# Altium PCB Airbrake Motor Controller.PcbDoc (part 1 of 2)
Units mil, origin at the board's own origin, x right, y up, seen from the top; angles counter-clockwise.
Board outline 2250 x 2250 mil, 4 copper layers (Top Layer, Layer 1, Layer 2, Bottom Layer), stack 23.756 mil thick; 103 components, 85 nets, 338 pads, 160 vias.
Unrouted connection lines stored in the file: 19.
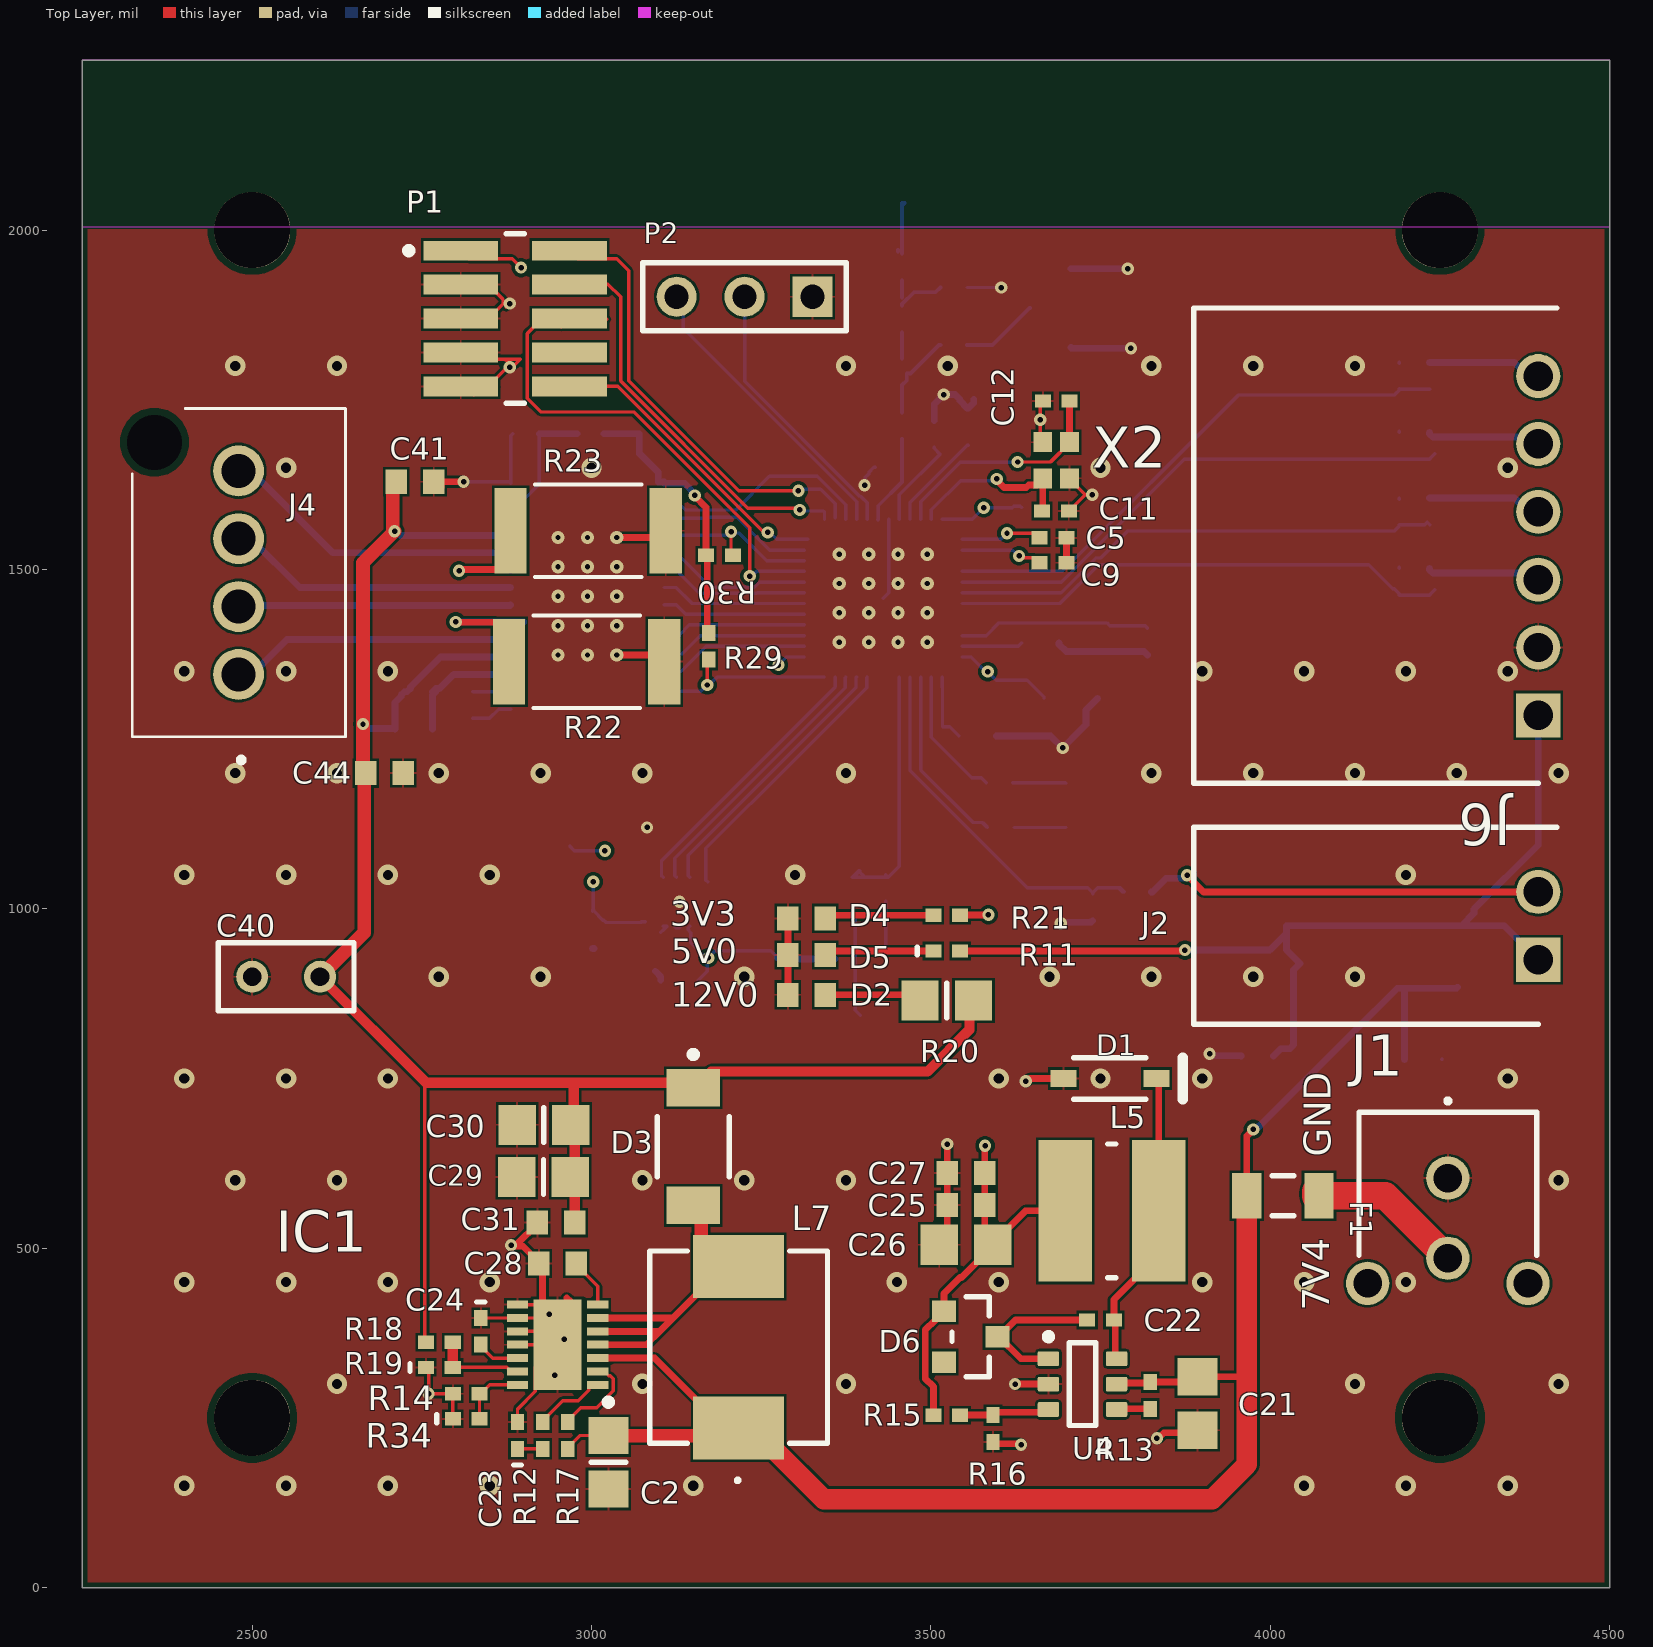
[diagram p0: Top Layer view]
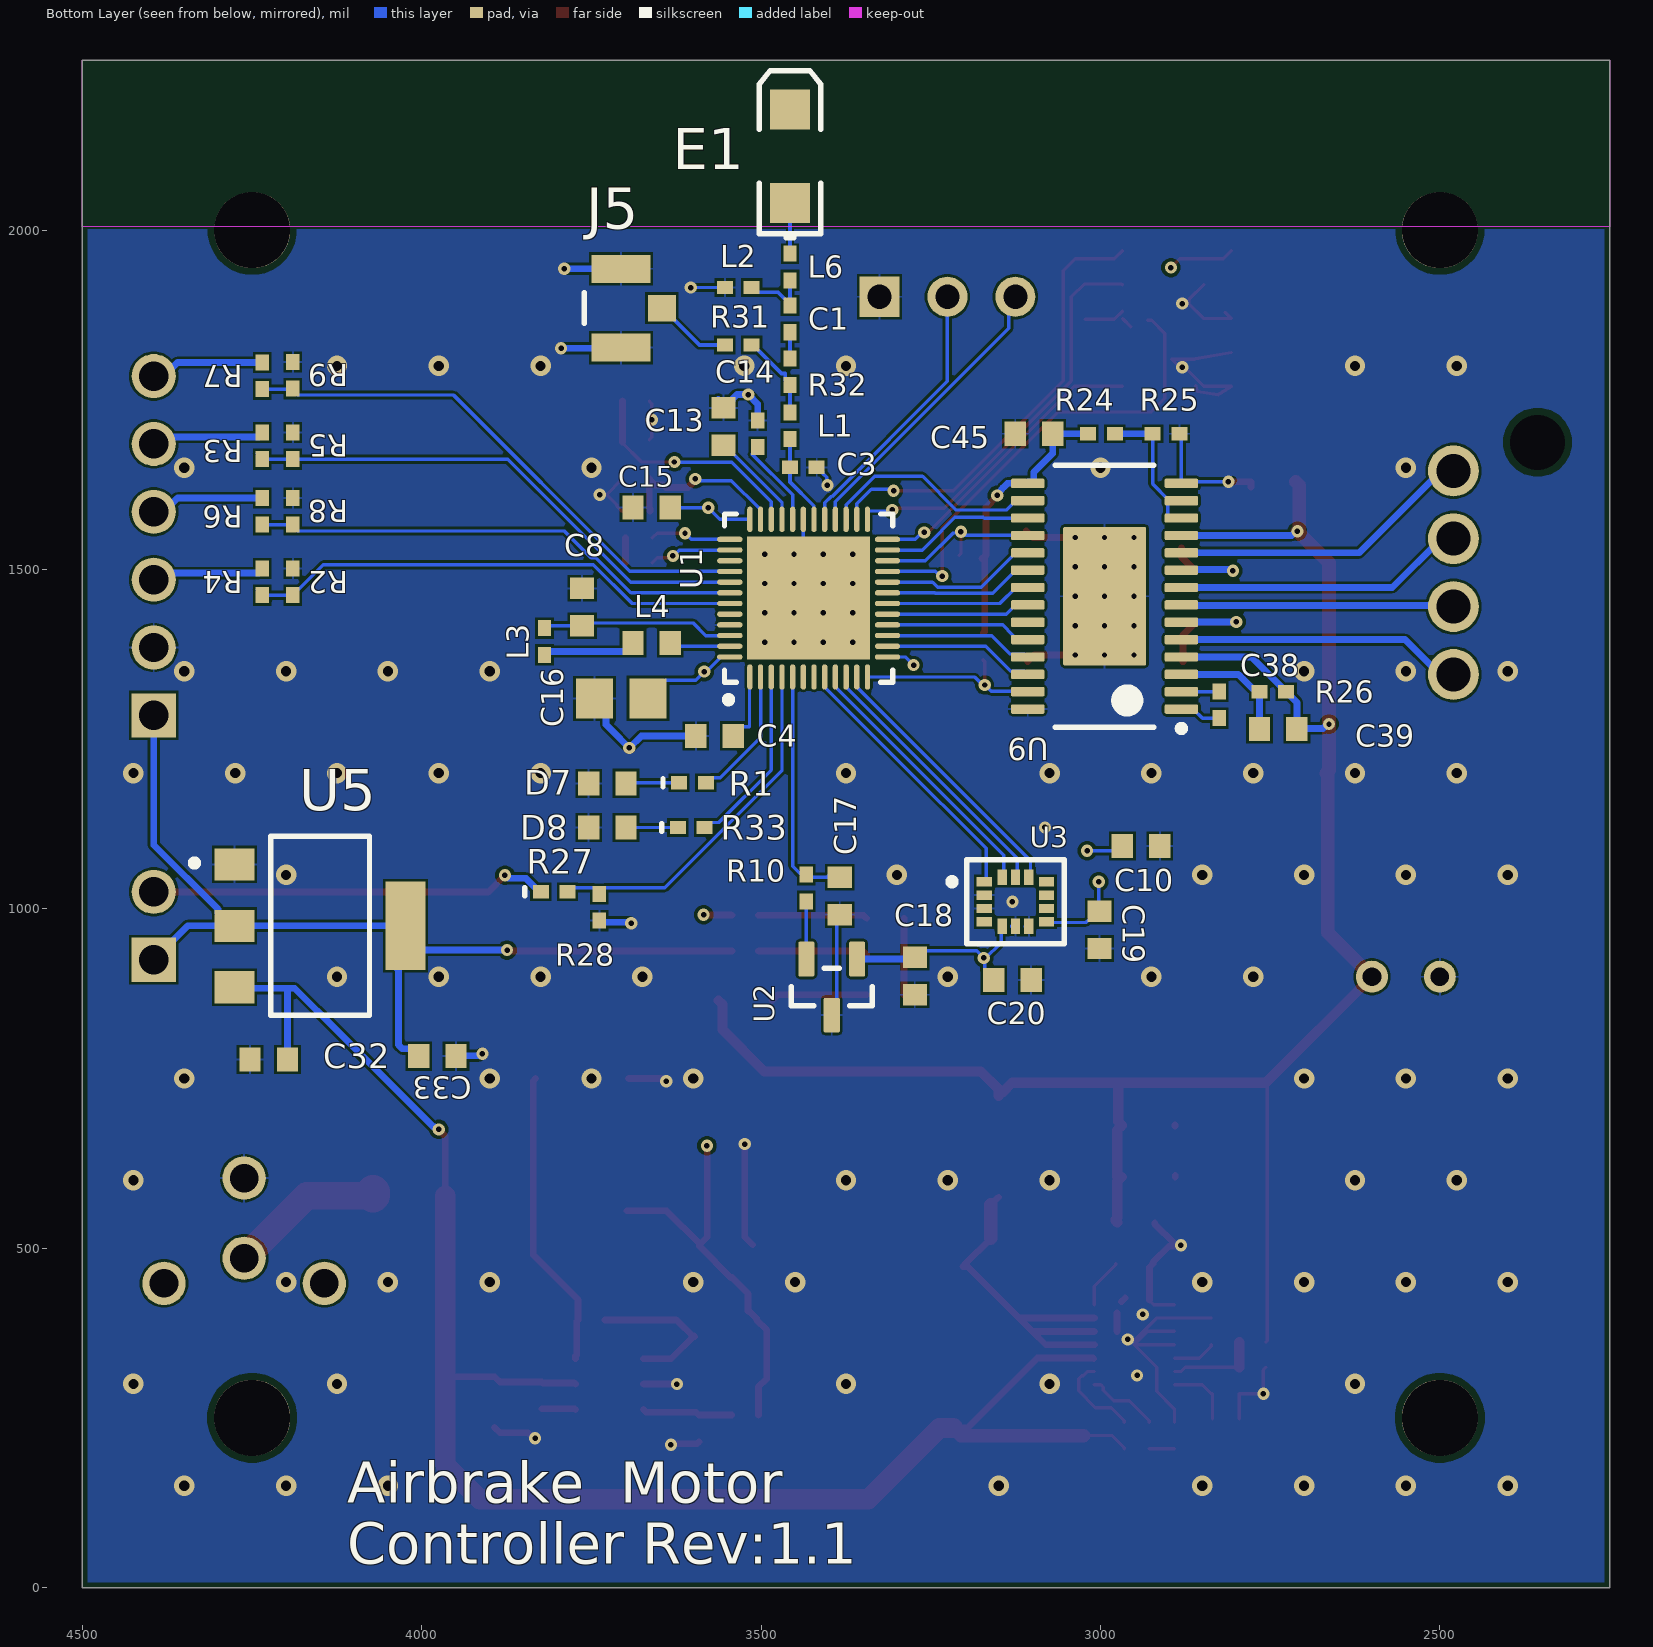
[diagram p1: Bottom Layer view, seen from below]
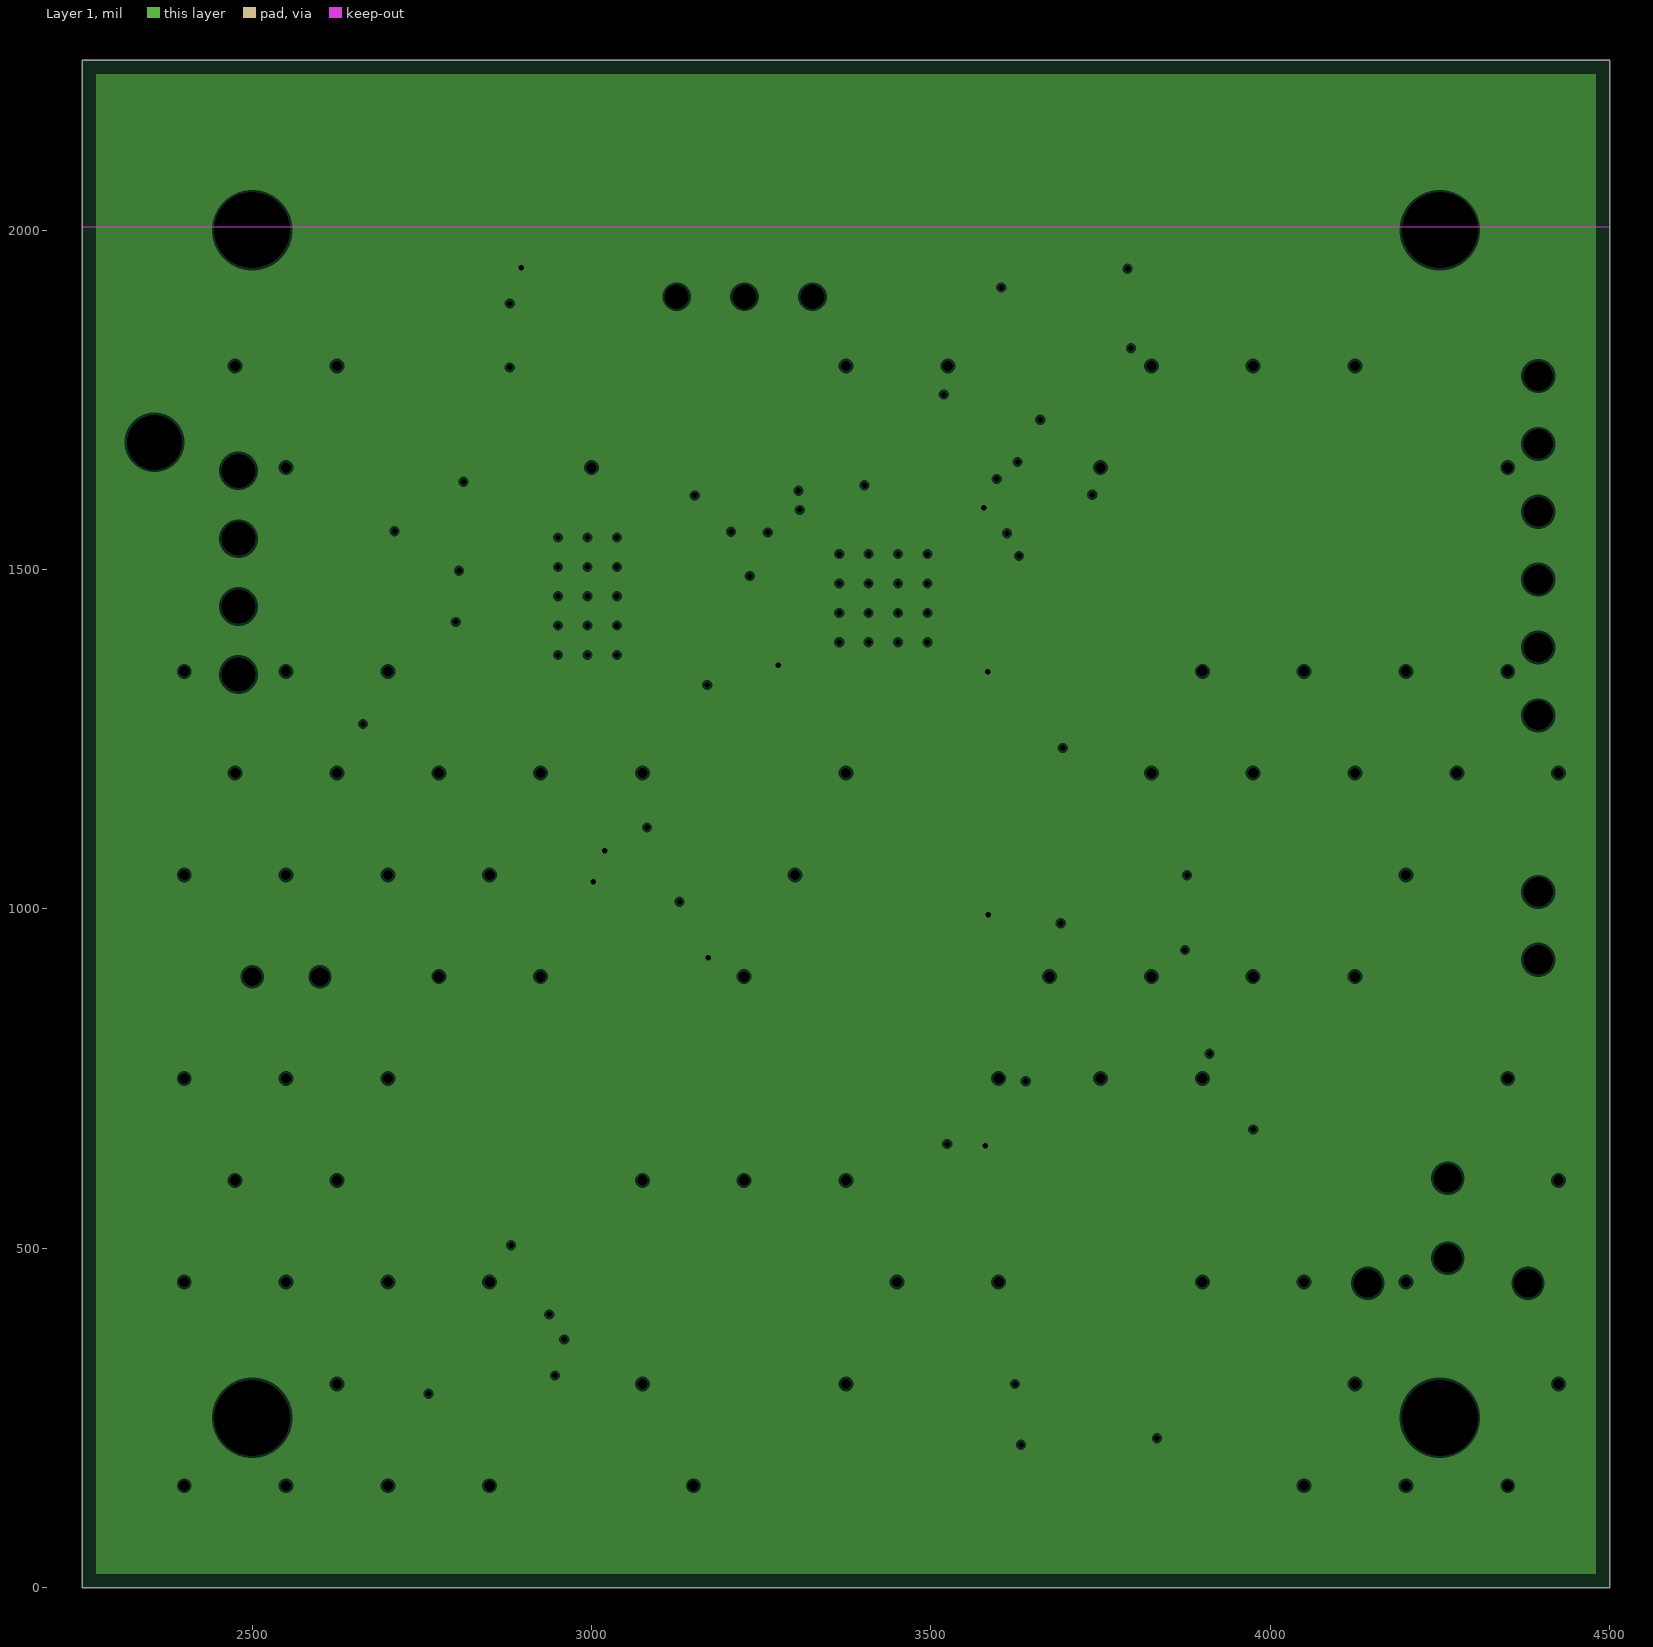
[diagram p2: Layer 1, clearances drawn from the general rule]
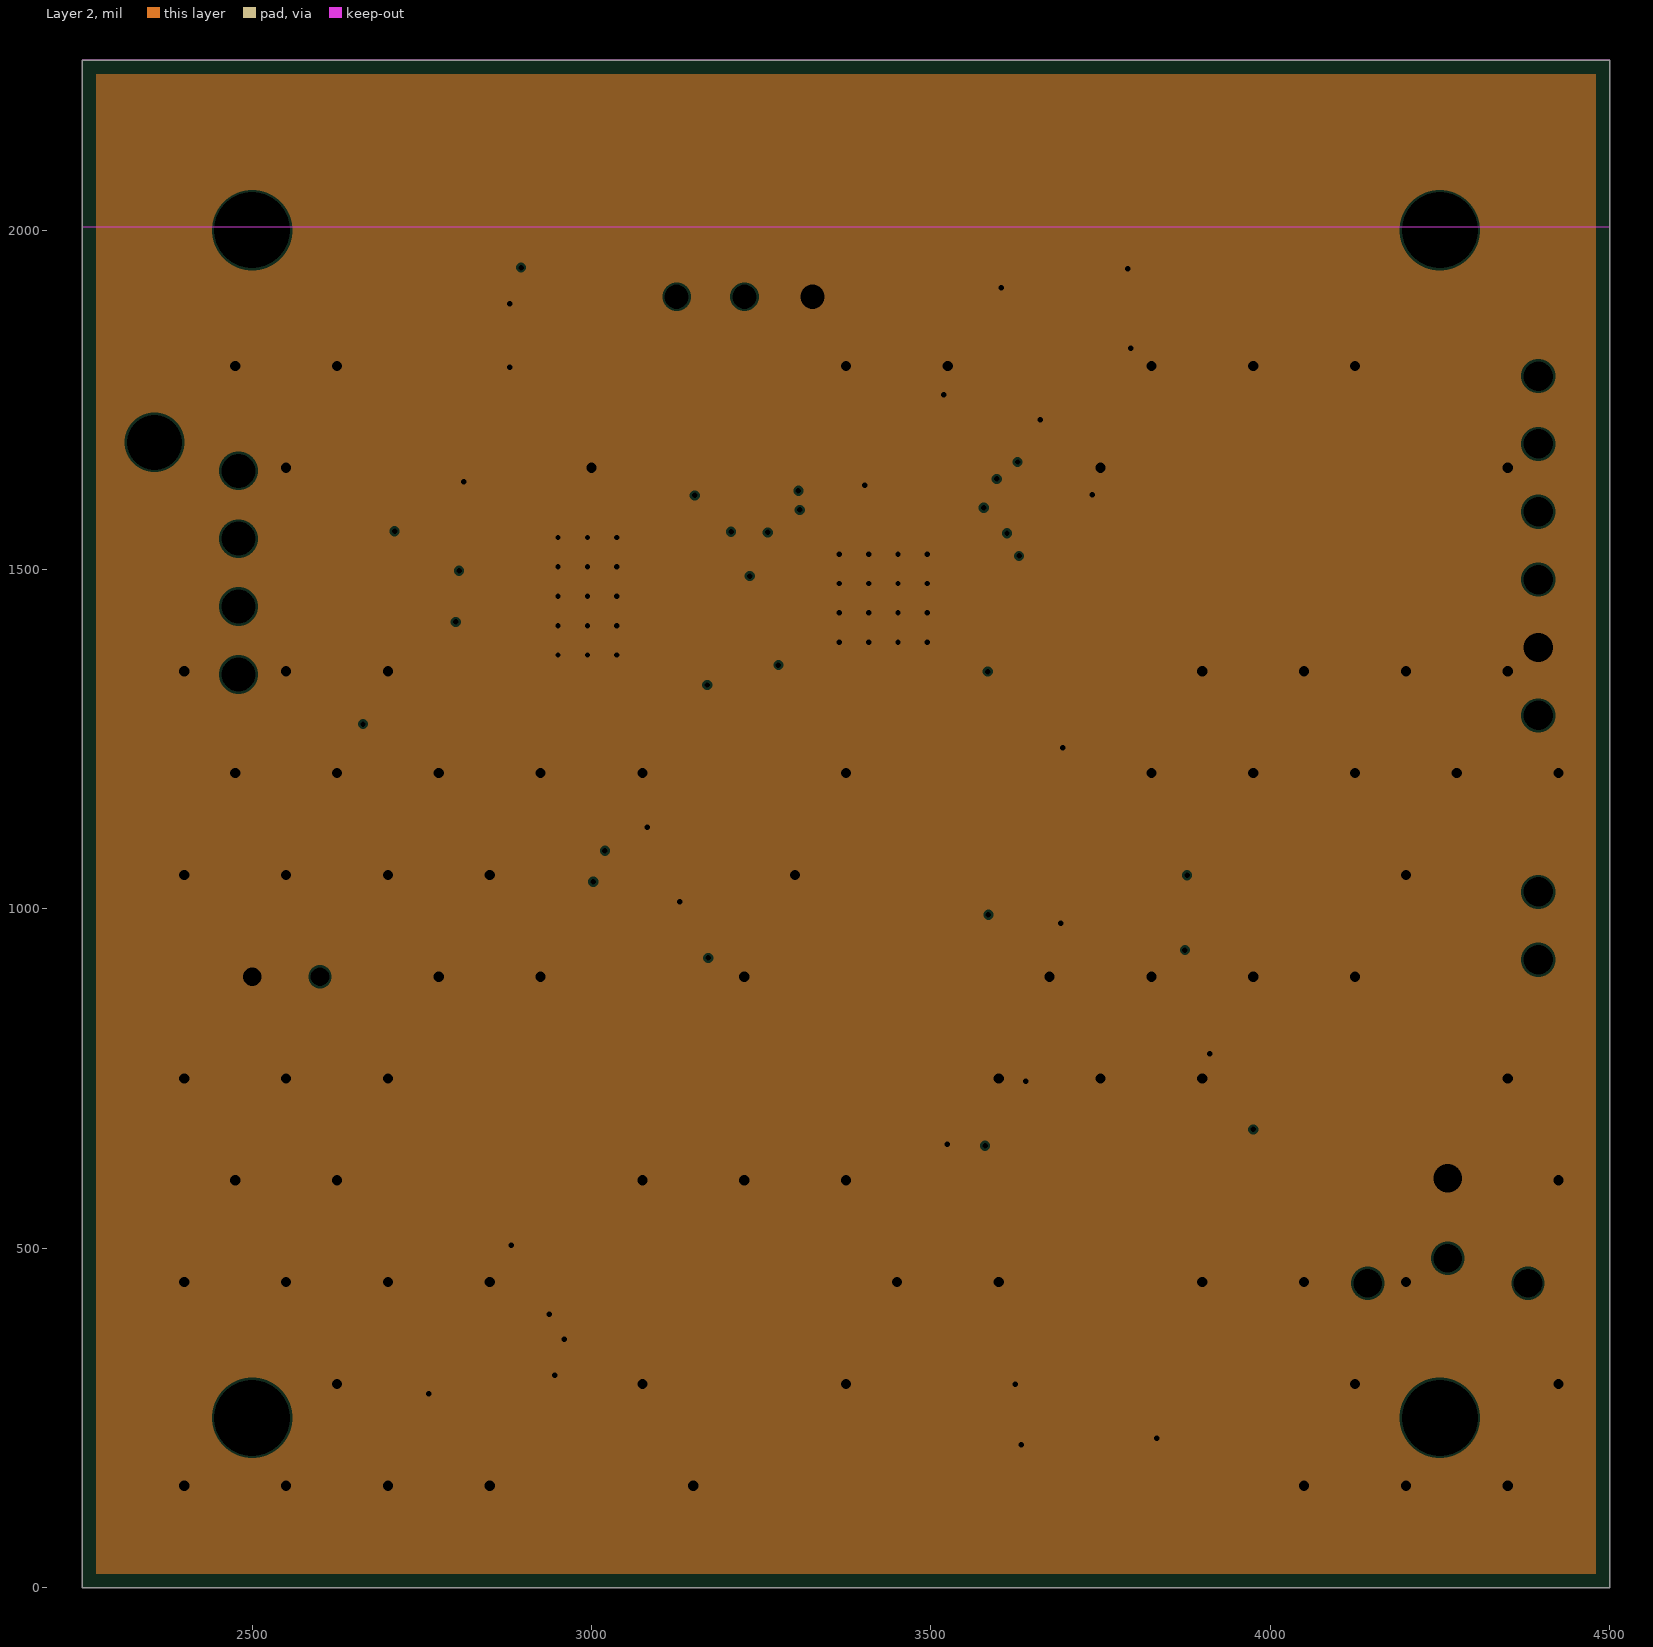
[diagram p3: Layer 2, clearances drawn from the general rule]

## Layer stack, top to bottom
Top Solder: solder mask 0.4, Solder Resist, Dk 3.5
Top Layer: signal copper 1.4
Dielectric 2: prepreg 2.8, PP-006, Dk 4.1
Layer 1: plane copper 1.378, net 3V3
Dielectric 1: dielectric 12.6, FR-4, Dk 4.8
Layer 2: plane copper 1.378, net GND
Dielectric 3: prepreg 2.8, PP-006, Dk 4.1
Bottom Layer: signal copper 1.4
Bottom Solder: solder mask 0.4, Solder Resist, Dk 3.5

## Board outline
2250,0 4500,0 4500,2250 2250,2250

## Design rules (kind name [scope] priority, off if disabled: settings)
BoardOutlineClearance [All] p1: gap=7.87 ignorepadtopadclearanceinfootprint=FALSE
Clearance [All] p1: gap=3.54 ignorepadtopadclearanceinfootprint=FALSE except(5: Arc-Via Track-Via SMDPad-Via THPad-Via Via-Via Via-Fill Via-Poly Via-Region Via-Text; 9.84: Arc-Hole Track-Hole SMDPad-Hole THPad-Hole Via-Hole Fill-Hole Poly-Hole Region-Hole Text-Hole)
ComponentClearance [All] p1: gap=3.5 collisioncheckmode=3 verticalgap=3.5 showdistances=TRUE
DiffPairsRouting 120OhmDiffPairs [InDifferentialPairClass('120Ohm')] p1: maxlimit=5 minlimit=5 mostfreqgap=5 substack1={1D8CD49F-4EEA-4594-B777-3CBCF2328C12} toplayer_{1d8cd49f-4eea-4594-b777-3cbcf2328c12}_minwidth=15 toplayer_{1d8cd49f-4eea-4594-b777-3cbcf2328c12}_maxwidth=15 toplayer_{1d8cd49f-4eea-4594-b777-3cbcf2328c12}_prefwidth=15 bottomlayer_{1d8cd49f-4eea-4594-b777-3cbcf2328c12}_minwidth=15 bottomlayer_{1d8cd49f-4eea-4594-b777-3cbcf2328c12}_maxwidth=15 bottomlayer_{1d8cd49f-4eea-4594-b777-3cbcf2328c12}_prefwidth=15 substack2={60200B00-BAF0-4EC6-BC13-ED241C6110E6} toplayer_{60200b00-baf0-4ec6-bc13-ed241c6110e6}_minwidth=15 toplayer_{60200b00-baf0-4ec6-bc13-ed241c6110e6}_maxwidth=15 toplayer_{60200b00-baf0-4ec6-bc13-ed241c6110e6}_prefwidth=15 bottomlayer_{60200b00-baf0-4ec6-bc13-ed241c6110e6}_minwidth=15 bottomlayer_{60200b00-baf0-4ec6-bc13-ed241c6110e6}_maxwidth=15 bottomlayer_{60200b00-baf0-4ec6-bc13-ed241c6110e6}_prefwidth=15 substack3={2033A8F8-11FA-4127-81A0-3110334D7064} toplayer_{2033a8f8-11fa-4127-81a0-3110334d7064}_minwidth=15 toplayer_{2033a8f8-11fa-4127-81a0-3110334d7064}_maxwidth=15 toplayer_{2033a8f8-11fa-4127-81a0-3110334d7064}_prefwidth=15 bottomlayer_{2033a8f8-11fa-4127-81a0-3110334d7064}_minwidth=15 bottomlayer_{2033a8f8-11fa-4127-81a0-3110334d7064}_maxwidth=15 bottomlayer_{2033a8f8-11fa-4127-81a0-3110334d7064}_prefwidth=15 substack4={D68601EE-FDA2-4314-95AA-3F224DECC2A0} toplayer_{d68601ee-fda2-4314-95aa-3f224decc2a0}_minwidth=15 toplayer_{d68601ee-fda2-4314-95aa-3f224decc2a0}_maxwidth=15 toplayer_{d68601ee-fda2-4314-95aa-3f224decc2a0}_prefwidth=15 bottomlayer_{d68601ee-fda2-4314-95aa-3f224decc2a0}_minwidth=15 bottomlayer_{d68601ee-fda2-4314-95aa-3f224decc2a0}_maxwidth=15 bottomlayer_{d68601ee-fda2-4314-95aa-3f224decc2a0}_prefwidth=15 substack5={DDA2C391-E1F9-40C6-9444-D76CE48EE4B7} toplayer_{dda2c391-e1f9-40c6-9444-d76ce48ee4b7}_minwidth=15 toplayer_{dda2c391-e1f9-40c6-9444-d76ce48ee4b7}_maxwidth=15 toplayer_{dda2c391-e1f9-40c6-9444-d76ce48ee4b7}_prefwidth=15 bottomlayer_{dda2c391-e1f9-40c6-9444-d76ce48ee4b7}_minwidth=15 bottomlayer_{dda2c391-e1f9-40c6-9444-d76ce48ee4b7}_maxwidth=15 bottomlayer_{dda2c391-e1f9-40c6-9444-d76ce48ee4b7}_prefwidth=15 substack6={67619F17-63B8-4237-8720-1B805477E003} toplayer_{67619f17-63b8-4237-8720-1b805477e003}_minwidth=15 toplayer_{67619f17-63b8-4237-8720-1b805477e003}_maxwidth=15 toplayer_{67619f17-63b8-4237-8720-1b805477e003}_prefwidth=15 bottomlayer_{67619f17-63b8-4237-8720-1b805477e003}_minwidth=15 bottomlayer_{67619f17-63b8-4237-8720-1b805477e003}_maxwidth=15 bottomlayer_{67619f17-63b8-4237-8720-1b805477e003}_prefwidth=15 toplayer_minwidth=2.63 toplayer_maxwidth=2.63 toplayer_prefwidth=2.63 bottomlayer_minwidth=2.63 bottomlayer_maxwidth=2.63 bottomlayer_prefwidth=2.63 substack7={87F45CA6-8762-4F65-A57C-34D04795256B} toplayer_{87f45ca6-8762-4f65-a57c-34d04795256b}_minwidth=15 toplayer_{87f45ca6-8762-4f65-a57c-34d04795256b}_maxwidth=15 toplayer_{87f45ca6-8762-4f65-a57c-34d04795256b}_prefwidth=15 bottomlayer_{87f45ca6-8762-4f65-a57c-34d04795256b}_minwidth=15 bottomlayer_{87f45ca6-8762-4f65-a57c-34d04795256b}_maxwidth=15 bottomlayer_{87f45ca6-8762-4f65-a57c-34d04795256b}_prefwidth=15 substack8={194D61EF-D4DC-468E-B6D5-786B1C598D2A} toplayer_{194d61ef-d4dc-468e-b6d5-786b1c598d2a}_minwidth=15 toplayer_{194d61ef-d4dc-468e-b6d5-786b1c598d2a}_maxwidth=15 toplayer_{194d61ef-d4dc-468e-b6d5-786b1c598d2a}_prefwidth=15 bottomlayer_{194d61ef-d4dc-468e-b6d5-786b1c598d2a}_minwidth=15 bottomlayer_{194d61ef-d4dc-468e-b6d5-786b1c598d2a}_maxwidth=15 bottomlayer_{194d61ef-d4dc-468e-b6d5-786b1c598d2a}_prefwidth=15 substack9={3F41A5DB-CA06-4CF2-BA7A-F14E5AEFF9D4} toplayer_{3f41a5db-ca06-4cf2-ba7a-f14e5aeff9d4}_minwidth=15 toplayer_{3f41a5db-ca06-4cf2-ba7a-f14e5aeff9d4}_maxwidth=15 toplayer_{3f41a5db-ca06-4cf2-ba7a-f14e5aeff9d4}_prefwidth=15 bottomlayer_{3f41a5db-ca06-4cf2-ba7a-f14e5aeff9d4}_minwidth=15 bottomlayer_{3f41a5db-ca06-4cf2-ba7a-f14e5aeff9d4}_maxwidth=15 bottomlayer_{3f41a5db-ca06-4cf2-ba7a-f14e5aeff9d4}_prefwidth=15 substack10={7F9F6F53-2B01-4EE7-9BAC-B8D45DA15D97} toplayer_{7f9f6f53-2b01-4ee7-9bac-b8d45da15d97}_minwidth=15 toplayer_{7f9f6f53-2b01-4ee7-9bac-b8d45da15d97}_maxwidth=15 toplayer_{7f9f6f53-2b01-4ee7-9bac-b8d45da15d97}_prefwidth=15 bottomlayer_{7f9f6f53-2b01-4ee7-9bac-b8d45da15d97}_minwidth=15 bottomlayer_{7f9f6f53-2b01-4ee7-9bac-b8d45da15d97}_maxwidth=15 bottomlayer_{7f9f6f53-2b01-4ee7-9bac-b8d45da15d97}_prefwidth=15 substack11={9D6A6761-42E1-4263-9333-28A519B7A445} toplayer_{9d6a6761-42e1-4263-9333-28a519b7a445}_minwidth=15 toplayer_{9d6a6761-42e1-4263-9333-28a519b7a445}_maxwidth=15 toplayer_{9d6a6761-42e1-4263-9333-28a519b7a445}_prefwidth=15 bottomlayer_{9d6a6761-42e1-4263-9333-28a519b7a445}_minwidth=15 bottomlayer_{9d6a6761-42e1-4263-9333-28a519b7a445}_maxwidth=15 bottomlayer_{9d6a6761-42e1-4263-9333-28a519b7a445}_prefwidth=15 impedanceprofiledriven=TRUE impedanceprofileid={E287B070-1990-45AA-885F-49F5262516A6} maxuncoupledlength=500
DiffPairsRouting 100OhmDiffPairs [InDifferentialPairClass('100Ohm')] p2: maxlimit=5 minlimit=5 mostfreqgap=5 substack1={1D8CD49F-4EEA-4594-B777-3CBCF2328C12} toplayer_{1d8cd49f-4eea-4594-b777-3cbcf2328c12}_minwidth=15 toplayer_{1d8cd49f-4eea-4594-b777-3cbcf2328c12}_maxwidth=15 toplayer_{1d8cd49f-4eea-4594-b777-3cbcf2328c12}_prefwidth=15 bottomlayer_{1d8cd49f-4eea-4594-b777-3cbcf2328c12}_minwidth=15 bottomlayer_{1d8cd49f-4eea-4594-b777-3cbcf2328c12}_maxwidth=15 bottomlayer_{1d8cd49f-4eea-4594-b777-3cbcf2328c12}_prefwidth=15 substack2={60200B00-BAF0-4EC6-BC13-ED241C6110E6} toplayer_{60200b00-baf0-4ec6-bc13-ed241c6110e6}_minwidth=15 toplayer_{60200b00-baf0-4ec6-bc13-ed241c6110e6}_maxwidth=15 toplayer_{60200b00-baf0-4ec6-bc13-ed241c6110e6}_prefwidth=15 bottomlayer_{60200b00-baf0-4ec6-bc13-ed241c6110e6}_minwidth=15 bottomlayer_{60200b00-baf0-4ec6-bc13-ed241c6110e6}_maxwidth=15 bottomlayer_{60200b00-baf0-4ec6-bc13-ed241c6110e6}_prefwidth=15 substack3={2033A8F8-11FA-4127-81A0-3110334D7064} toplayer_{2033a8f8-11fa-4127-81a0-3110334d7064}_minwidth=15 toplayer_{2033a8f8-11fa-4127-81a0-3110334d7064}_maxwidth=15 toplayer_{2033a8f8-11fa-4127-81a0-3110334d7064}_prefwidth=15 bottomlayer_{2033a8f8-11fa-4127-81a0-3110334d7064}_minwidth=15 bottomlayer_{2033a8f8-11fa-4127-81a0-3110334d7064}_maxwidth=15 bottomlayer_{2033a8f8-11fa-4127-81a0-3110334d7064}_prefwidth=15 substack4={D68601EE-FDA2-4314-95AA-3F224DECC2A0} toplayer_{d68601ee-fda2-4314-95aa-3f224decc2a0}_minwidth=15 toplayer_{d68601ee-fda2-4314-95aa-3f224decc2a0}_maxwidth=15 toplayer_{d68601ee-fda2-4314-95aa-3f224decc2a0}_prefwidth=15 bottomlayer_{d68601ee-fda2-4314-95aa-3f224decc2a0}_minwidth=15 bottomlayer_{d68601ee-fda2-4314-95aa-3f224decc2a0}_maxwidth=15 bottomlayer_{d68601ee-fda2-4314-95aa-3f224decc2a0}_prefwidth=15 substack5={DDA2C391-E1F9-40C6-9444-D76CE48EE4B7} toplayer_{dda2c391-e1f9-40c6-9444-d76ce48ee4b7}_minwidth=15 toplayer_{dda2c391-e1f9-40c6-9444-d76ce48ee4b7}_maxwidth=15 toplayer_{dda2c391-e1f9-40c6-9444-d76ce48ee4b7}_prefwidth=15 bottomlayer_{dda2c391-e1f9-40c6-9444-d76ce48ee4b7}_minwidth=15 bottomlayer_{dda2c391-e1f9-40c6-9444-d76ce48ee4b7}_maxwidth=15 bottomlayer_{dda2c391-e1f9-40c6-9444-d76ce48ee4b7}_prefwidth=15 substack6={67619F17-63B8-4237-8720-1B805477E003} toplayer_{67619f17-63b8-4237-8720-1b805477e003}_minwidth=15 toplayer_{67619f17-63b8-4237-8720-1b805477e003}_maxwidth=15 toplayer_{67619f17-63b8-4237-8720-1b805477e003}_prefwidth=15 bottomlayer_{67619f17-63b8-4237-8720-1b805477e003}_minwidth=15 bottomlayer_{67619f17-63b8-4237-8720-1b805477e003}_maxwidth=15 bottomlayer_{67619f17-63b8-4237-8720-1b805477e003}_prefwidth=15 toplayer_minwidth=4.51 toplayer_maxwidth=4.51 toplayer_prefwidth=4.51 bottomlayer_minwidth=4.51 bottomlayer_maxwidth=4.51 bottomlayer_prefwidth=4.51 substack7={87F45CA6-8762-4F65-A57C-34D04795256B} toplayer_{87f45ca6-8762-4f65-a57c-34d04795256b}_minwidth=15 toplayer_{87f45ca6-8762-4f65-a57c-34d04795256b}_maxwidth=15 toplayer_{87f45ca6-8762-4f65-a57c-34d04795256b}_prefwidth=15 bottomlayer_{87f45ca6-8762-4f65-a57c-34d04795256b}_minwidth=15 bottomlayer_{87f45ca6-8762-4f65-a57c-34d04795256b}_maxwidth=15 bottomlayer_{87f45ca6-8762-4f65-a57c-34d04795256b}_prefwidth=15 substack8={194D61EF-D4DC-468E-B6D5-786B1C598D2A} toplayer_{194d61ef-d4dc-468e-b6d5-786b1c598d2a}_minwidth=15 toplayer_{194d61ef-d4dc-468e-b6d5-786b1c598d2a}_maxwidth=15 toplayer_{194d61ef-d4dc-468e-b6d5-786b1c598d2a}_prefwidth=15 bottomlayer_{194d61ef-d4dc-468e-b6d5-786b1c598d2a}_minwidth=15 bottomlayer_{194d61ef-d4dc-468e-b6d5-786b1c598d2a}_maxwidth=15 bottomlayer_{194d61ef-d4dc-468e-b6d5-786b1c598d2a}_prefwidth=15 substack9={3F41A5DB-CA06-4CF2-BA7A-F14E5AEFF9D4} toplayer_{3f41a5db-ca06-4cf2-ba7a-f14e5aeff9d4}_minwidth=15 toplayer_{3f41a5db-ca06-4cf2-ba7a-f14e5aeff9d4}_maxwidth=15 toplayer_{3f41a5db-ca06-4cf2-ba7a-f14e5aeff9d4}_prefwidth=15 bottomlayer_{3f41a5db-ca06-4cf2-ba7a-f14e5aeff9d4}_minwidth=15 bottomlayer_{3f41a5db-ca06-4cf2-ba7a-f14e5aeff9d4}_maxwidth=15 bottomlayer_{3f41a5db-ca06-4cf2-ba7a-f14e5aeff9d4}_prefwidth=15 substack10={7F9F6F53-2B01-4EE7-9BAC-B8D45DA15D97} toplayer_{7f9f6f53-2b01-4ee7-9bac-b8d45da15d97}_minwidth=15 toplayer_{7f9f6f53-2b01-4ee7-9bac-b8d45da15d97}_maxwidth=15 toplayer_{7f9f6f53-2b01-4ee7-9bac-b8d45da15d97}_prefwidth=15 bottomlayer_{7f9f6f53-2b01-4ee7-9bac-b8d45da15d97}_minwidth=15 bottomlayer_{7f9f6f53-2b01-4ee7-9bac-b8d45da15d97}_maxwidth=15 bottomlayer_{7f9f6f53-2b01-4ee7-9bac-b8d45da15d97}_prefwidth=15 substack11={9D6A6761-42E1-4263-9333-28A519B7A445} toplayer_{9d6a6761-42e1-4263-9333-28a519b7a445}_minwidth=15 toplayer_{9d6a6761-42e1-4263-9333-28a519b7a445}_maxwidth=15 toplayer_{9d6a6761-42e1-4263-9333-28a519b7a445}_prefwidth=15 bottomlayer_{9d6a6761-42e1-4263-9333-28a519b7a445}_minwidth=15 bottomlayer_{9d6a6761-42e1-4263-9333-28a519b7a445}_maxwidth=15 bottomlayer_{9d6a6761-42e1-4263-9333-28a519b7a445}_prefwidth=15 impedanceprofiledriven=TRUE impedanceprofileid={2AE41D91-29D4-4592-BCE6-4F755B01D198} maxuncoupledlength=500
DiffPairsRouting 90OhmDiffPairs [InDifferentialPairClass('90Ohm')] p3: maxlimit=5 minlimit=5 mostfreqgap=5 substack1={1D8CD49F-4EEA-4594-B777-3CBCF2328C12} toplayer_{1d8cd49f-4eea-4594-b777-3cbcf2328c12}_minwidth=15 toplayer_{1d8cd49f-4eea-4594-b777-3cbcf2328c12}_maxwidth=15 toplayer_{1d8cd49f-4eea-4594-b777-3cbcf2328c12}_prefwidth=15 bottomlayer_{1d8cd49f-4eea-4594-b777-3cbcf2328c12}_minwidth=15 bottomlayer_{1d8cd49f-4eea-4594-b777-3cbcf2328c12}_maxwidth=15 bottomlayer_{1d8cd49f-4eea-4594-b777-3cbcf2328c12}_prefwidth=15 substack2={60200B00-BAF0-4EC6-BC13-ED241C6110E6} toplayer_{60200b00-baf0-4ec6-bc13-ed241c6110e6}_minwidth=15 toplayer_{60200b00-baf0-4ec6-bc13-ed241c6110e6}_maxwidth=15 toplayer_{60200b00-baf0-4ec6-bc13-ed241c6110e6}_prefwidth=15 bottomlayer_{60200b00-baf0-4ec6-bc13-ed241c6110e6}_minwidth=15 bottomlayer_{60200b00-baf0-4ec6-bc13-ed241c6110e6}_maxwidth=15 bottomlayer_{60200b00-baf0-4ec6-bc13-ed241c6110e6}_prefwidth=15 substack3={2033A8F8-11FA-4127-81A0-3110334D7064} toplayer_{2033a8f8-11fa-4127-81a0-3110334d7064}_minwidth=15 toplayer_{2033a8f8-11fa-4127-81a0-3110334d7064}_maxwidth=15 toplayer_{2033a8f8-11fa-4127-81a0-3110334d7064}_prefwidth=15 bottomlayer_{2033a8f8-11fa-4127-81a0-3110334d7064}_minwidth=15 bottomlayer_{2033a8f8-11fa-4127-81a0-3110334d7064}_maxwidth=15 bottomlayer_{2033a8f8-11fa-4127-81a0-3110334d7064}_prefwidth=15 substack4={D68601EE-FDA2-4314-95AA-3F224DECC2A0} toplayer_{d68601ee-fda2-4314-95aa-3f224decc2a0}_minwidth=15 toplayer_{d68601ee-fda2-4314-95aa-3f224decc2a0}_maxwidth=15 toplayer_{d68601ee-fda2-4314-95aa-3f224decc2a0}_prefwidth=15 bottomlayer_{d68601ee-fda2-4314-95aa-3f224decc2a0}_minwidth=15 bottomlayer_{d68601ee-fda2-4314-95aa-3f224decc2a0}_maxwidth=15 bottomlayer_{d68601ee-fda2-4314-95aa-3f224decc2a0}_prefwidth=15 substack5={DDA2C391-E1F9-40C6-9444-D76CE48EE4B7} toplayer_{dda2c391-e1f9-40c6-9444-d76ce48ee4b7}_minwidth=15 toplayer_{dda2c391-e1f9-40c6-9444-d76ce48ee4b7}_maxwidth=15 toplayer_{dda2c391-e1f9-40c6-9444-d76ce48ee4b7}_prefwidth=15 bottomlayer_{dda2c391-e1f9-40c6-9444-d76ce48ee4b7}_minwidth=15 bottomlayer_{dda2c391-e1f9-40c6-9444-d76ce48ee4b7}_maxwidth=15 bottomlayer_{dda2c391-e1f9-40c6-9444-d76ce48ee4b7}_prefwidth=15 substack6={67619F17-63B8-4237-8720-1B805477E003} toplayer_{67619f17-63b8-4237-8720-1b805477e003}_minwidth=15 toplayer_{67619f17-63b8-4237-8720-1b805477e003}_maxwidth=15 toplayer_{67619f17-63b8-4237-8720-1b805477e003}_prefwidth=15 bottomlayer_{67619f17-63b8-4237-8720-1b805477e003}_minwidth=15 bottomlayer_{67619f17-63b8-4237-8720-1b805477e003}_maxwidth=15 bottomlayer_{67619f17-63b8-4237-8720-1b805477e003}_prefwidth=15 toplayer_minwidth=5.85 toplayer_maxwidth=5.85 toplayer_prefwidth=5.85 bottomlayer_minwidth=5.85 bottomlayer_maxwidth=5.85 bottomlayer_prefwidth=5.85 substack7={87F45CA6-8762-4F65-A57C-34D04795256B} toplayer_{87f45ca6-8762-4f65-a57c-34d04795256b}_minwidth=15 toplayer_{87f45ca6-8762-4f65-a57c-34d04795256b}_maxwidth=15 toplayer_{87f45ca6-8762-4f65-a57c-34d04795256b}_prefwidth=15 bottomlayer_{87f45ca6-8762-4f65-a57c-34d04795256b}_minwidth=15 bottomlayer_{87f45ca6-8762-4f65-a57c-34d04795256b}_maxwidth=15 bottomlayer_{87f45ca6-8762-4f65-a57c-34d04795256b}_prefwidth=15 substack8={194D61EF-D4DC-468E-B6D5-786B1C598D2A} toplayer_{194d61ef-d4dc-468e-b6d5-786b1c598d2a}_minwidth=15 toplayer_{194d61ef-d4dc-468e-b6d5-786b1c598d2a}_maxwidth=15 toplayer_{194d61ef-d4dc-468e-b6d5-786b1c598d2a}_prefwidth=15 bottomlayer_{194d61ef-d4dc-468e-b6d5-786b1c598d2a}_minwidth=15 bottomlayer_{194d61ef-d4dc-468e-b6d5-786b1c598d2a}_maxwidth=15 bottomlayer_{194d61ef-d4dc-468e-b6d5-786b1c598d2a}_prefwidth=15 substack9={3F41A5DB-CA06-4CF2-BA7A-F14E5AEFF9D4} toplayer_{3f41a5db-ca06-4cf2-ba7a-f14e5aeff9d4}_minwidth=15 toplayer_{3f41a5db-ca06-4cf2-ba7a-f14e5aeff9d4}_maxwidth=15 toplayer_{3f41a5db-ca06-4cf2-ba7a-f14e5aeff9d4}_prefwidth=15 bottomlayer_{3f41a5db-ca06-4cf2-ba7a-f14e5aeff9d4}_minwidth=15 bottomlayer_{3f41a5db-ca06-4cf2-ba7a-f14e5aeff9d4}_maxwidth=15 bottomlayer_{3f41a5db-ca06-4cf2-ba7a-f14e5aeff9d4}_prefwidth=15 substack10={7F9F6F53-2B01-4EE7-9BAC-B8D45DA15D97} toplayer_{7f9f6f53-2b01-4ee7-9bac-b8d45da15d97}_minwidth=15 toplayer_{7f9f6f53-2b01-4ee7-9bac-b8d45da15d97}_maxwidth=15 toplayer_{7f9f6f53-2b01-4ee7-9bac-b8d45da15d97}_prefwidth=15 bottomlayer_{7f9f6f53-2b01-4ee7-9bac-b8d45da15d97}_minwidth=15 bottomlayer_{7f9f6f53-2b01-4ee7-9bac-b8d45da15d97}_maxwidth=15 bottomlayer_{7f9f6f53-2b01-4ee7-9bac-b8d45da15d97}_prefwidth=15 substack11={9D6A6761-42E1-4263-9333-28A519B7A445} toplayer_{9d6a6761-42e1-4263-9333-28a519b7a445}_minwidth=15 toplayer_{9d6a6761-42e1-4263-9333-28a519b7a445}_maxwidth=15 toplayer_{9d6a6761-42e1-4263-9333-28a519b7a445}_prefwidth=15 bottomlayer_{9d6a6761-42e1-4263-9333-28a519b7a445}_minwidth=15 bottomlayer_{9d6a6761-42e1-4263-9333-28a519b7a445}_maxwidth=15 bottomlayer_{9d6a6761-42e1-4263-9333-28a519b7a445}_prefwidth=15 impedanceprofiledriven=TRUE impedanceprofileid={0AC2A555-4B6F-4755-A2BA-0C0075E72B6B} maxuncoupledlength=500
DiffPairsRouting [All] p4: maxlimit=3.54 minlimit=3.54 mostfreqgap=3.54 substack1={1D8CD49F-4EEA-4594-B777-3CBCF2328C12} toplayer_{1d8cd49f-4eea-4594-b777-3cbcf2328c12}_minwidth=15 toplayer_{1d8cd49f-4eea-4594-b777-3cbcf2328c12}_maxwidth=15 toplayer_{1d8cd49f-4eea-4594-b777-3cbcf2328c12}_prefwidth=15 bottomlayer_{1d8cd49f-4eea-4594-b777-3cbcf2328c12}_minwidth=15 bottomlayer_{1d8cd49f-4eea-4594-b777-3cbcf2328c12}_maxwidth=15 bottomlayer_{1d8cd49f-4eea-4594-b777-3cbcf2328c12}_prefwidth=15 substack2={60200B00-BAF0-4EC6-BC13-ED241C6110E6} toplayer_{60200b00-baf0-4ec6-bc13-ed241c6110e6}_minwidth=15 toplayer_{60200b00-baf0-4ec6-bc13-ed241c6110e6}_maxwidth=15 toplayer_{60200b00-baf0-4ec6-bc13-ed241c6110e6}_prefwidth=15 bottomlayer_{60200b00-baf0-4ec6-bc13-ed241c6110e6}_minwidth=15 bottomlayer_{60200b00-baf0-4ec6-bc13-ed241c6110e6}_maxwidth=15 bottomlayer_{60200b00-baf0-4ec6-bc13-ed241c6110e6}_prefwidth=15 substack3={2033A8F8-11FA-4127-81A0-3110334D7064} toplayer_{2033a8f8-11fa-4127-81a0-3110334d7064}_minwidth=15 toplayer_{2033a8f8-11fa-4127-81a0-3110334d7064}_maxwidth=15 toplayer_{2033a8f8-11fa-4127-81a0-3110334d7064}_prefwidth=15 bottomlayer_{2033a8f8-11fa-4127-81a0-3110334d7064}_minwidth=15 bottomlayer_{2033a8f8-11fa-4127-81a0-3110334d7064}_maxwidth=15 bottomlayer_{2033a8f8-11fa-4127-81a0-3110334d7064}_prefwidth=15 substack4={D68601EE-FDA2-4314-95AA-3F224DECC2A0} toplayer_{d68601ee-fda2-4314-95aa-3f224decc2a0}_minwidth=15 toplayer_{d68601ee-fda2-4314-95aa-3f224decc2a0}_maxwidth=15 toplayer_{d68601ee-fda2-4314-95aa-3f224decc2a0}_prefwidth=15 bottomlayer_{d68601ee-fda2-4314-95aa-3f224decc2a0}_minwidth=15 bottomlayer_{d68601ee-fda2-4314-95aa-3f224decc2a0}_maxwidth=15 bottomlayer_{d68601ee-fda2-4314-95aa-3f224decc2a0}_prefwidth=15 substack5={DDA2C391-E1F9-40C6-9444-D76CE48EE4B7} toplayer_{dda2c391-e1f9-40c6-9444-d76ce48ee4b7}_minwidth=15 toplayer_{dda2c391-e1f9-40c6-9444-d76ce48ee4b7}_maxwidth=15 toplayer_{dda2c391-e1f9-40c6-9444-d76ce48ee4b7}_prefwidth=15 bottomlayer_{dda2c391-e1f9-40c6-9444-d76ce48ee4b7}_minwidth=15 bottomlayer_{dda2c391-e1f9-40c6-9444-d76ce48ee4b7}_maxwidth=15 bottomlayer_{dda2c391-e1f9-40c6-9444-d76ce48ee4b7}_prefwidth=15 substack6={67619F17-63B8-4237-8720-1B805477E003} toplayer_{67619f17-63b8-4237-8720-1b805477e003}_minwidth=15 toplayer_{67619f17-63b8-4237-8720-1b805477e003}_maxwidth=15 toplayer_{67619f17-63b8-4237-8720-1b805477e003}_prefwidth=15 bottomlayer_{67619f17-63b8-4237-8720-1b805477e003}_minwidth=15 bottomlayer_{67619f17-63b8-4237-8720-1b805477e003}_maxwidth=15 bottomlayer_{67619f17-63b8-4237-8720-1b805477e003}_prefwidth=15 toplayer_minwidth=3.54 toplayer_maxwidth=71497.94 toplayer_prefwidth=3.54 bottomlayer_minwidth=3.54 bottomlayer_maxwidth=71497.94 bottomlayer_prefwidth=3.54 substack7={87F45CA6-8762-4F65-A57C-34D04795256B} toplayer_{87f45ca6-8762-4f65-a57c-34d04795256b}_minwidth=15 toplayer_{87f45ca6-8762-4f65-a57c-34d04795256b}_maxwidth=15 toplayer_{87f45ca6-8762-4f65-a57c-34d04795256b}_prefwidth=15 bottomlayer_{87f45ca6-8762-4f65-a57c-34d04795256b}_minwidth=15 bottomlayer_{87f45ca6-8762-4f65-a57c-34d04795256b}_maxwidth=15 bottomlayer_{87f45ca6-8762-4f65-a57c-34d04795256b}_prefwidth=15 substack8={194D61EF-D4DC-468E-B6D5-786B1C598D2A} toplayer_{194d61ef-d4dc-468e-b6d5-786b1c598d2a}_minwidth=15 toplayer_{194d61ef-d4dc-468e-b6d5-786b1c598d2a}_maxwidth=15 toplayer_{194d61ef-d4dc-468e-b6d5-786b1c598d2a}_prefwidth=15 bottomlayer_{194d61ef-d4dc-468e-b6d5-786b1c598d2a}_minwidth=15 bottomlayer_{194d61ef-d4dc-468e-b6d5-786b1c598d2a}_maxwidth=15 bottomlayer_{194d61ef-d4dc-468e-b6d5-786b1c598d2a}_prefwidth=15 substack9={3F41A5DB-CA06-4CF2-BA7A-F14E5AEFF9D4} toplayer_{3f41a5db-ca06-4cf2-ba7a-f14e5aeff9d4}_minwidth=15 toplayer_{3f41a5db-ca06-4cf2-ba7a-f14e5aeff9d4}_maxwidth=15 toplayer_{3f41a5db-ca06-4cf2-ba7a-f14e5aeff9d4}_prefwidth=15 bottomlayer_{3f41a5db-ca06-4cf2-ba7a-f14e5aeff9d4}_minwidth=15 bottomlayer_{3f41a5db-ca06-4cf2-ba7a-f14e5aeff9d4}_maxwidth=15 bottomlayer_{3f41a5db-ca06-4cf2-ba7a-f14e5aeff9d4}_prefwidth=15 substack10={7F9F6F53-2B01-4EE7-9BAC-B8D45DA15D97} toplayer_{7f9f6f53-2b01-4ee7-9bac-b8d45da15d97}_minwidth=15 toplayer_{7f9f6f53-2b01-4ee7-9bac-b8d45da15d97}_maxwidth=15 toplayer_{7f9f6f53-2b01-4ee7-9bac-b8d45da15d97}_prefwidth=15 bottomlayer_{7f9f6f53-2b01-4ee7-9bac-b8d45da15d97}_minwidth=15 bottomlayer_{7f9f6f53-2b01-4ee7-9bac-b8d45da15d97}_maxwidth=15 bottomlayer_{7f9f6f53-2b01-4ee7-9bac-b8d45da15d97}_prefwidth=15 substack11={9D6A6761-42E1-4263-9333-28A519B7A445} toplayer_{9d6a6761-42e1-4263-9333-28a519b7a445}_minwidth=15 toplayer_{9d6a6761-42e1-4263-9333-28a519b7a445}_maxwidth=15 toplayer_{9d6a6761-42e1-4263-9333-28a519b7a445}_prefwidth=15 bottomlayer_{9d6a6761-42e1-4263-9333-28a519b7a445}_minwidth=15 bottomlayer_{9d6a6761-42e1-4263-9333-28a519b7a445}_maxwidth=15 bottomlayer_{9d6a6761-42e1-4263-9333-28a519b7a445}_prefwidth=15 maxuncoupledlength=500
Height [All] p1: minheight=0 maxheight=71497.94 prefheight=500
HoleSize [All] p1: absolutevalues=TRUE maxlimit=248.03 minlimit=7.87 maxpercent=80.000 minpercent=20.000
HoleToHoleClearance [All] p1: gap=9.84 allowstackedmicrovias=FALSE
MinimumAnnularRing [All] p1: minimumring=3
MinimumSolderMaskSliver [All] p1: minsoldermaskwidth=0
PlaneClearance [All] p1: clearance=3.5
PlaneConnect PlaneConnectPowerPads [InPadClass('PowerPads')] p1: planeconnectstyle=Direct reliefexpansion=20 reliefentries=4 reliefconductorwidth=10 reliefairgap=10
PlaneConnect [All] p2: pad.planeconnectstyle=Relief pad.reliefexpansion=11.81 pad.reliefentries=4 pad.reliefconductorwidth=3.5 pad.reliefairgap=3.5 via.planeconnectstyle=Direct via.reliefexpansion=11.81 via.reliefentries=4 via.reliefconductorwidth=5 via.reliefairgap=5
PolygonConnect PolygonConnectPowerPads [All vs (InPadClass('PowerPads'))] p1: connectstyle=Direct reliefconductorwidth=10 reliefentries=4 polygonreliefangle="90 Angle" airgapwidth=10
PolygonConnect [All] p2: thpad.connectstyle=Relief thpad.reliefconductorwidth=3.5 thpad.reliefentries=4 thpad.polygonreliefangle="90 Angle" thpad.airgapwidth=3.5 smdpad.connectstyle=Relief smdpad.reliefconductorwidth=3.5 smdpad.reliefentries=4 smdpad.polygonreliefangle="90 Angle" smdpad.airgapwidth=3.5 via.connectstyle=Direct via.reliefconductorwidth=5 via.reliefentries=4 via.polygonreliefangle="90 Angle" via.airgapwidth=5
ReturnPath 120OhmReturn [InDifferentialPairClass('120Ohm')] p1: impedanceprofileid={E287B070-1990-45AA-885F-49F5262516A6} _gaplimit=0 _useantipads=TRUE
ReturnPath 100OhmReturn [InDifferentialPairClass('100Ohm')] p2: impedanceprofileid={2AE41D91-29D4-4592-BCE6-4F755B01D198} _gaplimit=0 _useantipads=TRUE
ReturnPath 90OhmReturn [InDifferentialPairClass('90Ohm')] p3: impedanceprofileid={0AC2A555-4B6F-4755-A2BA-0C0075E72B6B} _gaplimit=0 _useantipads=TRUE
ReturnPath 60OhmReturn [InNetClass('60Ohm')] p4: impedanceprofileid={AA7C0548-6338-4AC9-AD2A-66174299CF1B} _gaplimit=0 _useantipads=TRUE
ReturnPath 50OhmReturn [InNetClass('50Ohm')] p5: impedanceprofileid={38A28C89-5808-4632-B31D-CFF1778F07F1} _gaplimit=0 _useantipads=TRUE
RoutingVias [All] p1: holewidth=7.87 width=17.72 viastyle="Through Hole" minholewidth=7.87 minwidth=17.72 maxholewidth=248.03 maxwidth=257.87
SilkToSilkClearance [All] p1: silktosilkclearance=0
SilkToSolderMaskClearance [IsPad] p1: minsilkscreentomaskgap=3.5 clearancetoexposedcopper=TRUE
SolderMaskExpansion ViaSolderMaskExpansion [IsVia] p1: expansion=4 istentingtop=TRUE
SolderMaskExpansion [All] p2: expansion=2.95 istentingtop=FALSE
Width 60OhmWidth [InNetClass('60Ohm')] p1: maxlimit=4.59 minlimit=4.59 preferedwidth=4.59 substack1={1D8CD49F-4EEA-4594-B777-3CBCF2328C12} substack2={60200B00-BAF0-4EC6-BC13-ED241C6110E6} substack3={2033A8F8-11FA-4127-81A0-3110334D7064} substack4={D68601EE-FDA2-4314-95AA-3F224DECC2A0} substack5={DDA2C391-E1F9-40C6-9444-D76CE48EE4B7} substack6={67619F17-63B8-4237-8720-1B805477E003} substack7={87F45CA6-8762-4F65-A57C-34D04795256B} substack8={194D61EF-D4DC-468E-B6D5-786B1C598D2A} substack9={3F41A5DB-CA06-4CF2-BA7A-F14E5AEFF9D4} substack10={7F9F6F53-2B01-4EE7-9BAC-B8D45DA15D97} substack11={9D6A6761-42E1-4263-9333-28A519B7A445} impedanceprofiledriven=TRUE impedanceprofileid={AA7C0548-6338-4AC9-AD2A-66174299CF1B} minimp=50.000000 maximp=50.000000 favimp=50.000000
Width 50OhmWidth [InNetClass('50Ohm')] p2: maxlimit=6.79 minlimit=6.79 preferedwidth=6.79 substack1={1D8CD49F-4EEA-4594-B777-3CBCF2328C12} substack2={60200B00-BAF0-4EC6-BC13-ED241C6110E6} substack3={2033A8F8-11FA-4127-81A0-3110334D7064} substack4={D68601EE-FDA2-4314-95AA-3F224DECC2A0} substack5={DDA2C391-E1F9-40C6-9444-D76CE48EE4B7} substack6={67619F17-63B8-4237-8720-1B805477E003} substack7={87F45CA6-8762-4F65-A57C-34D04795256B} substack8={194D61EF-D4DC-468E-B6D5-786B1C598D2A} substack9={3F41A5DB-CA06-4CF2-BA7A-F14E5AEFF9D4} substack10={7F9F6F53-2B01-4EE7-9BAC-B8D45DA15D97} substack11={9D6A6761-42E1-4263-9333-28A519B7A445} impedanceprofiledriven=TRUE impedanceprofileid={38A28C89-5808-4632-B31D-CFF1778F07F1} minimp=50.000000 maximp=50.000000 favimp=50.000000
Width [All] p3: maxlimit=71497.94 minlimit=3.54 preferedwidth=3.54 substack1={1D8CD49F-4EEA-4594-B777-3CBCF2328C12} substack2={60200B00-BAF0-4EC6-BC13-ED241C6110E6} substack3={2033A8F8-11FA-4127-81A0-3110334D7064} substack4={D68601EE-FDA2-4314-95AA-3F224DECC2A0} substack5={DDA2C391-E1F9-40C6-9444-D76CE48EE4B7} substack6={67619F17-63B8-4237-8720-1B805477E003} substack7={87F45CA6-8762-4F65-A57C-34D04795256B} substack8={194D61EF-D4DC-468E-B6D5-786B1C598D2A} substack9={3F41A5DB-CA06-4CF2-BA7A-F14E5AEFF9D4} substack10={7F9F6F53-2B01-4EE7-9BAC-B8D45DA15D97} substack11={9D6A6761-42E1-4263-9333-28A519B7A445} minimp=50.000000 maximp=50.000000 favimp=50.000000
20 further rules are at their usual default settings.

## Classes and differential pairs
component class Designator: C17 C18 R10 U2

## Components (designator, comment, footprint, x,y, rotation, side; value= is the part's Value field where it differs from the comment)
C1 "Cap" 0402-A 3457.56,1869.25 r270 bottom value=1.2pF
C2 "Cap" 6-0805_M 3024.8,184.57 r90 top value=10uF
C3 "Cap" 0402-A 3437.87,1650.54 r0 bottom value=0.8pF
C4 "Cap" 1608[0603] 3568.69,1254.78 r180 bottom value=100nF
C5 "Cap" 0402-A 3680,1546.61 r0 top value=12pF
C8 "Cap" 1608[0603] 3763.78,1444.57 r270 bottom value=1uF
C9 "Cap" 0402-A 3680,1509.93 r0 top value=12pF
C10 "Cap" 1608[0603] 2940.15,1092.58 r180 bottom value=100nF
C11 "Cap" 0402-A 3683.59,1586.13 r180 top value=12pF
C12 "Cap" 0402-A 3684.73,1748.24 r0 top value=12pF
C13 "Cap" 1608[0603] 3555.39,1710.5 r90 bottom value=100nF
C14 "Cap" 0402-A 3505.13,1700 r90 bottom value=NC
C15 "Cap" 1608[0603] 3661.3,1591.33 r0 bottom value=100nF
C16 "Cap" 6-0805_M 3706.16,1310 r0 bottom value=4.7uF
C17 "Cap" 1608[0603] 3384.19,1018.94 r270 bottom value=680pF
C18 "Cap" 1608[0603] 3273.61,900.91 r270 bottom value=100nF
C19 "Cap" 1608[0603] 3001.55,969.08 r90 bottom value=100nF
C20 "Cap" 1608[0603] 3129.75,895 r0 bottom value=100nF
C21 "Cap" 6-0805_M 3892.8,271.17 r90 top value=10uF
C22 "Cap" 0402-A 3750,394.24 r180 top value=10nF
C23 "Cap" 0402-A 2890.94,223.94 r90 top value=4.7nF
C24 "Cap" 0402-A 2837.01,377.43 r270 top value=33nF
C25 "Cap" 1608[0603] 3551.81,563.37 r0 top value=1uF
C26 "Cap" 6-0805_M 3551.81,505.01 r0 top value=10uF
C27 "Cap" 1608[0603] 3551.81,610.82 r0 top value=100nF
C28 "Cap" 1608[0603] 2950,477.46 r0 top value=100nF
C29 "Cap" 6-0805_M 2929.37,605 r0 top value=10uF
C30 "Cap" 6-0805_M 2929.8,681.78 r0 top value=10uF
C31 "Cap" 1608[0603] 2947.76,537.62 r0 top value=1uF
C32 "Cap" 1608[0603] 4225.52,778 r180 bottom value=1uF
C33 "Cap" 1608[0603] 3977.16,783 r0 bottom value=4.7uF
C38 "Cap" 0402-A 2825,1300.59 r90 bottom value=12pF
C39 "Cap" 1608[0603] 2738.17,1265.15 r0 bottom value=100nF
C40 "Cap2" RAD-0.1 2550,900 r180 top value=100uF
C41 "Cap" 1608[0603] 2740,1629.26 r180 top value=100nF
C44 "Cap" 1608[0603] 2694.86,1200 r180 top value=100nF
C45 "Cap" 1608[0603] 3098,1700 r180 bottom value=470nF
D1 "STPS0540Z" STM-SOD-123-2_V 3763.8,750 r0 top
D2 "LED0" 1608[0603] 3316.92,873.35 r180 top
D3 "RSX501LAM20TR" FP-PMDTM-MFG 3150,649.62 r270 top
D4 "LED0" 1608[0603] 3316.92,985.99 r180 top
D5 "LED0" 1608[0603] 3316.92,931.92 r180 top
D6 "BAT54-7-F" FP-SOT23-MFG 3558.73,369.59 r0 top value=10pF
D7 "LED0" 1608[0603] 3726.66,1184.8 r0 bottom
D8 "LED0" 1608[0603] 3726.66,1119.84 r0 bottom
E1 "Antenna" 3.2X1.6X1.1 3457.56,2108.9 r90 bottom
F1 "Fuse 1" C1206 4018.78,577.35 r0 top
IC1 "MP3426DL-LF-Z" SON50P300X400X100-15N-D 2950,357.74 r180 top
J1 "0430450212" 0430450212 4261.75,700.49 r180 top
J2 "0705530036" SHDRRA2W64P0X254_1X2_737X1359X699P 4395,925 r90 top locked
J4 "2-644486-4" 26444864 2480,1345.37 r90 top
J5 "U.FL-R-SMT-1(10)" FP-U_FL-R-SMT-1_10-MFG 3706.38,1885 r270 bottom
J6 "0705530005" SHDRRA6W64P0X254_1X6_1779X1359X699P 4395,1285 r90 top locked
L1 "Inductor" 0402-A 3457.56,1711.81 r90 bottom value=3.9nH
L2 "Inductor" 0402-A 3533.74,1915.43 r180 bottom value=2.7nH
L3 "Inductor" 0402-A 3819.24,1393.86 r270 bottom value=15nH
L4 "Inductor" 1608[0603] 3661.3,1391.76 r180 bottom value=10uH
L5 "4.7uH" WE-TPC-4818-M 3766.77,555 r180 top
L6 "Inductor" 0402-A 3457.56,1945.68 r270 bottom value=3.3nH
L7 "ASPI-0630LR-4R7M-T15" ASPI-0630LR 3216.81,354.09 r90 top
P1 "SWD" SMTC-FTSH-105-01-L-DV-K_V 2887.45,1869.8 r270 top
P2 "Header 3" HDR1X3 3325.56,1901.9 r180 top
R1 "Res1" 0402-A 3601.3,1185.99 r180 bottom value=330
R2 "Res1" 0402-A 4234.93,1481.77 r90 bottom value=5k
R3 "Res1" 0402-A 4234.93,1682.24 r90 bottom value=5k
R4 "Res1" 0402-A 4190,1481.77 r90 bottom value=10k
R5 "Res1" 0402-A 4190,1682.24 r90 bottom value=10k
R6 "Res1" 0402-A 4234.93,1585.71 r90 bottom value=5k
R7 "Res1" 0402-A 4234.93,1785.3 r90 bottom value=5k
R8 "Res1" 0402-A 4190,1585.71 r90 bottom value=10k
R9 "Res1" 0402-A 4190,1786.08 r90 bottom value=10k
R10 "Res1" 0402-A 3433.4,1030.75 r90 bottom value=0
R11 "Res1" 0402-A 3523.44,937.82 r0 top value=330
R12 "Res1" 0402-A 2928,223.94 r90 top value=12k
R13 "Res1" 0402-A 3823.25,282.98 r90 top value=10k
R14 "Res1" 0402-A 2815.35,285.59 r0 top value=100k
R15 "Res1" 0402-A 3523.55,254.04 r0 top value=16.5k
R16 "Res1" 0402-A 3591.57,234.36 r90 top value=10k
R17 "Res1" 0402-A 2965,223.94 r270 top value=100k
R18 "Res1" 0402-A 2775.88,361.43 r180 top value=82k
R19 "Res1" 0402-A 2775.88,324.28 r0 top value=9.1k
R20 "Res1" 6-0805_M 3523.44,864.99 r0 top value=470
R21 "Res1" 0402-A 3523.44,990.47 r0 top value=330
R22 "Res1" RC2512N_PAN 2992.93,1364.16 r180 top value=220m
R23 "Res1" RC2512N_PAN 2995.11,1557.08 r180 top value=220m
R24 "Res1" 0402-A 2998.64,1700 r0 bottom value=10k
R25 "Res1" 0402-A 2903.44,1700 r180 bottom value=10k
R26 "Res1" 0402-A 2746.04,1319.87 r0 bottom value=1M
R27 "Res1" 0402-A 3805,1025 r180 bottom value=5k
R28 "Res1" 0402-A 3738.47,1002.28 r270 bottom value=10k
R29 "Res1" 0402-A 3172.6,1386.89 r270 top value=10k
R30 "Res1" 0402-A 3188.49,1520.87 r0 top value=10k
R31 "Res1" 0402-A 3533.74,1830.77 r0 bottom value=0
R32 "Res1" 0402-A 3457.56,1791.4 r90 bottom value=0
R33 "Res1" 0402-A 3603.14,1119.84 r180 bottom value=330
R34 "Res1" 0402-A 2815.35,248.46 r0 top value=100k
U1 "NRF52832-QFAA-R" NRSC-QF-48_M 3430,1457.75 r90 bottom locked
U2 "TMP235AQDBZTQ1" FP-DBZ0003A-MFG 3396,884.67 r270 bottom
U3 "LSM6DSMTR" FP-LGA-14L-DM00249496-MFG 3125.31,1010.4 r180 bottom
U4 "LM2736XMK/NOPB" DDC0006A_L 3723.46,299.71 r0 top
U5 "LDL1117S50R" FP-SOT-223-0046067_14-MFG 4150,975 r180 bottom locked (schematic designator U?)
U9 "DRV8825PWP" PWP0028C_L 2994.02,1460.62 r0 bottom
X2 "XRCGB32M000F1H00R0" XRCGB32M000F1H00R0 3684.73,1660.95 r270 top

## Footprints (in the part's own frame and the unit in brackets; to place one, negate y for a bottom-side part, rotate by r counter-clockwise, add the part's x,y. Pads: shape width x height; smd on the part's side, far side on the other; paste and mask are expansions set on the pad)
3.2X1.6X1.1 [mm] "SMT LED; 2 Flat Leads"
  rect 1.5x1.5 smd: 1(-1.75,0) 2(1.75,0)
  silkscreen extent -2.9,-1.15 3.2,1.15
6-0805_M [mm] "Chip Resistor, Body 2.0x1.2mm, IPC Low Density"
  rect 1.4x1.5 smd: 1(-1,0) 2(1,0)
  silkscreen extent 0,-0.65 0,0.65, body extent -1.07,-0.7 1.07,0.7, height 0.7
0402-A [mm] "Chip Inductor, Body 1.0x0.5mm, IPC High Density"
  rect 0.6x0.5 smd: 1(-0.5,0) 2(0.5,0)
  body extent -0.55,-0.3 0.55,0.3, height 0.55
1608[0603] [mm] "Chip Capacitor, Body 1.6x0.8mm, IPC High Density"
  rect 0.8x0.9 smd: 1(-0.7,0) 2(0.7,0)
  body extent -0.87,-0.48 0.87,0.48, height 1.3
26444864 [mm]
  round 1.905 hole 1.27: 1(0,0) 2(2.54,0) 3(5.08,0) 4(7.62,0)
  round 1.028 hole 2.057 unplated: MH1(8.687,3.15)
  silkscreen extent -3.3,-4 9.95,3.98, body extent -2.26,-3.61 10.04,4.35, height 10.21
0430450212 [mm]
  round 1.62 hole 1.07: 1(0,2.47) 2(0,5.47) 3(-3,6.41) 4(3,6.41)
  silkscreen extent -3.32,-0.49 3.32,5.36, body extent -3.57,0.06 3.57,8.83, height 9.12
ASPI-0630LR [mm]
  rect 2.35x3.4 smd: 1(-3.025,0) 2(3.025,0)
  silkscreen extent -5.02,-3.32 3.6,3.32
C1206 [mm] "Chip Capacitor, Body 3.2x1.6mm, IPC High Density"
  rect 1.1x1.7 smd: 1(-1.35,0) 2(1.35,0)
  silkscreen extent -0.4,-0.75 0.4,0.75, body extent -1.7,-0.9 1.7,0.9, height 1.3
DDC0006A_L [mm] "SOT23, 6-Leads, Body 3.05x1.75mm, Pitch 0.95mm, IPC High Density"
  rrect18% 0.8x0.55 smd: 1(-1.275,0.95) 2(-1.275,0) 3(-1.275,-0.95) 4(1.275,-0.95) 5(1.275,0) 6(1.275,0.95)
  silkscreen extent -1.4,-1.55 0.5,1.9, body extent -1.43,-1.48 1.43,1.49, height 0.9
FP-DBZ0003A-MFG [mm]
  rrect17% 1.3x0.6 smd paste+0 mask+0: 1(-1.05,0.95) 2(-1.05,-0.95) 3(1.05,0)
  silkscreen extent -0.7,-1.52 0.7,1.52, body extent -1.18,-1.46 1.18,1.46, height 1.12
FP-LGA-14L-DM00249496-MFG [mm]
  rect 0.575x0.35 smd paste+0 mask+0: 1(-1.162,0.75) 2(-1.162,0.25) 3(-1.162,-0.25) 4(-1.162,-0.75) 8(1.162,-0.75) 9(1.162,-0.25) 10(1.162,0.25) 11(1.162,0.75)
  rect 0.35x0.575 smd paste+0 mask+0: 5(-0.5,-0.913) 6(0,-0.913) 7(0.5,-0.913) 12(0.5,0.913) 13(0,0.913) 14(-0.5,0.913)
  silkscreen extent -2.5,-1.58 1.83,1.58, body extent -1.5,-1.25 1.5,1.25, height 0.86
FP-PMDTM-MFG [mm]
  rect 1.4x2 smd paste+0 mask+0: 1(-2.2,0) 2(2.2,0)
  silkscreen extent -3.57,-1.35 1.12,1.35, body extent -3,-1.45 3,1.45, height 0.25
FP-SOT23-MFG [mm]
  rect 0.9x0.8 smd paste+0 mask+0: 1(-1,0.95) 2(-1,-0.95) 3(1,0)
  silkscreen extent -0.7,-1.5 0.7,1.5, body extent -1.55,-1.6 1.55,1.6, height 0.25
FP-SOT-223-0046067_14-MFG [mm]
  rect 1.5x1.2 smd paste+0 mask+0: 1(-3.2,2.3) 2(-3.2,0) 3(-3.2,-2.3)
  rect 1.5x3.3 smd paste+0 mask+0: 4(3.2,0)
  silkscreen extent -4.83,-3.35 1.85,3.35, body extent -3.5,-3.25 3.5,3.25, height 1.9
FP-U_FL-R-SMT-1_10-MFG [mm]
  rect 1x1.05 smd paste-1000 mask+0: 1(0,1.525)
  rect 1.05x2.2 smd paste-1000 mask+0: 2(-1.475,0) 3(1.475,0)
  silkscreen extent -0.58,-1.38 0.58,-1.38, body extent -1.5,-1.55 1.5,1.55, height 1.45
HDR1X3 [mm] "Connector; Header; 3 Position"
  rect 1.5x1.5 hole 0.9: 1(0,0)
  round 1.5 hole 0.9: 2(2.54,0) 3(5.08,0)
  silkscreen extent -1.27,-1.27 6.35,1.27
NRSC-QF-48_M [mm] "QFN, 48-Leads, Body 6.00x6.00mm, Pitch 0.40mm, Thermal Pad 4.60x4.60mm, IPC Low Density"
  oval 0.95x0.2 smd: 1(-2.95,2.2) 2(-2.95,1.8) 3(-2.95,1.4) 4(-2.95,1) 5(-2.95,0.6) 6(-2.95,0.2) 7(-2.95,-0.2) 8(-2.95,-0.6) 9(-2.95,-1) 10(-2.95,-1.4) 11(-2.95,-1.8) 12(-2.95,-2.2) 25(2.95,-2.2) 26(2.95,-1.8) 27(2.95,-1.4) 28(2.95,-1) 29(2.95,-0.6) 30(2.95,-0.2) 31(2.95,0.2) 32(2.95,0.6) 33(2.95,1) 34(2.95,1.4) 35(2.95,1.8) 36(2.95,2.2)
  oval 0.2x0.95 smd: 13(-2.2,-2.95) 14(-1.8,-2.95) 15(-1.4,-2.95) 16(-1,-2.95) 17(-0.6,-2.95) 18(-0.2,-2.95) 19(0.2,-2.95) 20(0.6,-2.95) 21(1,-2.95) 22(1.4,-2.95) 23(1.8,-2.95) 24(2.2,-2.95) 37(2.2,2.95) 38(1.8,2.95) 39(1.4,2.95) 40(1,2.95) 41(0.6,2.95) 42(0.2,2.95) 43(-0.2,2.95) 44(-0.6,2.95) 45(-1,2.95) 46(-1.4,2.95) 47(-1.8,2.95) 48(-2.2,2.95)
  rect 4.6x4.6 smd: 49(0,0)
  silkscreen extent -3.92,-3.15 3.15,3.15, body extent -3,-3 3,3, height 0.9
PWP0028C_L [mm] "SOP, 28-Leads, Body 9.8x4.5mm, Pitch 0.65mm, Thermal Pad 5.18x3.1mm, IPC High Density"
  rrect29% 1.25x0.35 smd: 1(-2.875,4.225) 2(-2.875,3.575) 3(-2.875,2.925) 4(-2.875,2.275) 5(-2.875,1.625) 6(-2.875,0.975) 7(-2.875,0.325) 8(-2.875,-0.325) 9(-2.875,-0.975) 10(-2.875,-1.625) 11(-2.875,-2.275) 12(-2.875,-2.925) 13(-2.875,-3.575) 14(-2.875,-4.225) 15(2.875,-4.225) 16(2.875,-3.575) 17(2.875,-2.925) 18(2.875,-2.275) 19(2.875,-1.625) 20(2.875,-0.975) 21(2.875,-0.325) 22(2.875,0.325) 23(2.875,0.975) 24(2.875,1.625) 25(2.875,2.275) 26(2.875,2.925) 27(2.875,3.575) 28(2.875,4.225)
  rrect3% 3.1x5.18 smd: 29(0,0)
  silkscreen extent -3,-4.9 1.85,5.07, body extent -2.25,-4.9 2.25,4.9, height 1.2
RAD-0.1 [mm] "Radial Cap, Thru-Hole; 2 Leads; 0.1 in Pin Spacing"
  round 1.2 hole 0.7: 1(-1.27,0) 2(1.27,0)
  silkscreen extent -2.54,-1.27 2.54,1.27
RC2512N_PAN [mm]
  rect 1.206x3.2 smd paste+0 mask+0: 1(-2.903,0) 2(2.903,0)
  silkscreen extent -1.99,-1.73 1.99,1.73, body extent 0,0 0.25,0.25, height 0.25
SHDRRA2W64P0X254_1X2_737X1359X699P [mm]
  rect 1.65x1.65 hole 1.1: 1(0,0)
  round 1.65 hole 1.1: 2(2.54,0)
  silkscreen extent -2.41,-0.7 4.95,12.89, body extent -2.41,-0.7 4.95,12.89, height 6.99
SHDRRA6W64P0X254_1X6_1779X1359X699P [mm]
  rect 1.65x1.65 hole 1.1: 1(0,0)
  round 1.65 hole 1.1: 2(2.54,0) 3(5.08,0) 4(7.62,0) 5(10.16,0) 6(12.7,0)
  silkscreen extent -2.55,-0.7 15.25,12.89, body extent -2.55,-0.7 15.25,12.89, height 6.99
SMTC-FTSH-105-01-L-DV-K_V [mm] "CONN, 10-Leads, Body 6.35x3.43mm, Pitch 1.27mm"
  rect 0.74x2.79 smd: 1(-2.54,-2.035) 2(-2.54,2.035) 3(-1.27,-2.035) 4(-1.27,2.035) 5(0,-2.035) 6(0,2.035) 7(1.27,-2.035) 8(1.27,2.035) 9(2.54,-2.035) 10(2.54,2.035)
  silkscreen extent -3.17,-4.1 3.17,0.34, body extent -3.17,-2.92 3.18,2.92, height 6.12
SON50P300X400X100-15N-D [mm]
  rect 0.8x0.3 smd: 1(-1.5,1.5) 2(-1.5,1) 3(-1.5,0.5) 4(-1.5,0) 5(-1.5,-0.5) 6(-1.5,-1) 7(-1.5,-1.5) 8(1.5,-1.5) 9(1.5,-1) 10(1.5,-0.5) 11(1.5,0) 12(1.5,0.5) 13(1.5,1) 14(1.5,1.5)
  rect 1.8x3.4 smd: 15(0,0)
  silkscreen extent -2.02,2.03 -1.78,2.27, body extent -1.55,-2 1.55,2, height 1
STM-SOD-123-2_V [mm] "SOP, 2-Leads, Body 2.7x1.55mm"
  rect 0.97x0.65 smd: 1(-1.74,0) 2(1.74,0)
  silkscreen extent -1.35,-0.77 2.72,0.77, body extent -1.37,-0.77 1.37,0.77, height 1.45
WE-TPC-4818-M [mm] "SMD Inductor, 2-Leads, Body 4.8 x 4.8 mm"
  rect 2x5.3 smd: 1(-1.75,0) 2(1.75,0)
  silkscreen extent -0.15,-2.5 0.15,2.5, body extent -2.4,-2.4 2.4,2.4, height 1.79
XRCGB32M000F1H00R0 [mm]
  rect 0.75x0.7 smd: 1(-0.675,0.5) 2(0.675,0.5) 3(0.675,-0.5) 4(-0.675,-0.5)
  body extent -1,-0.8 1,0.8, height 0.65